# Allegro board ex2_rlc.brd
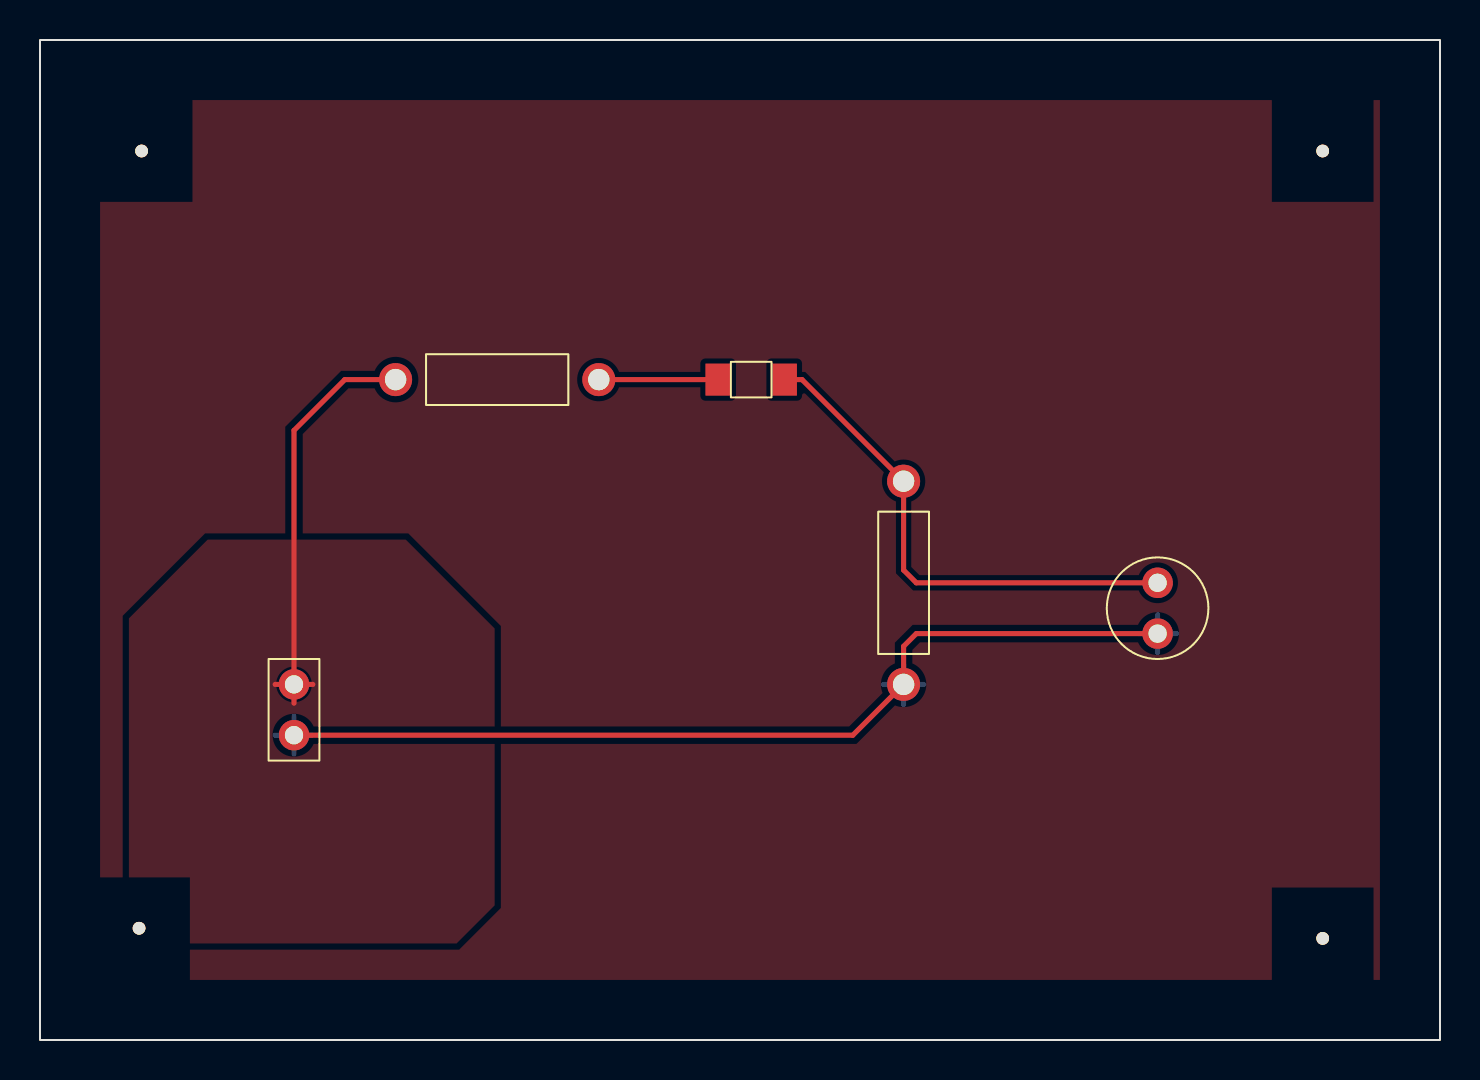
[diagram p0: board, top side]
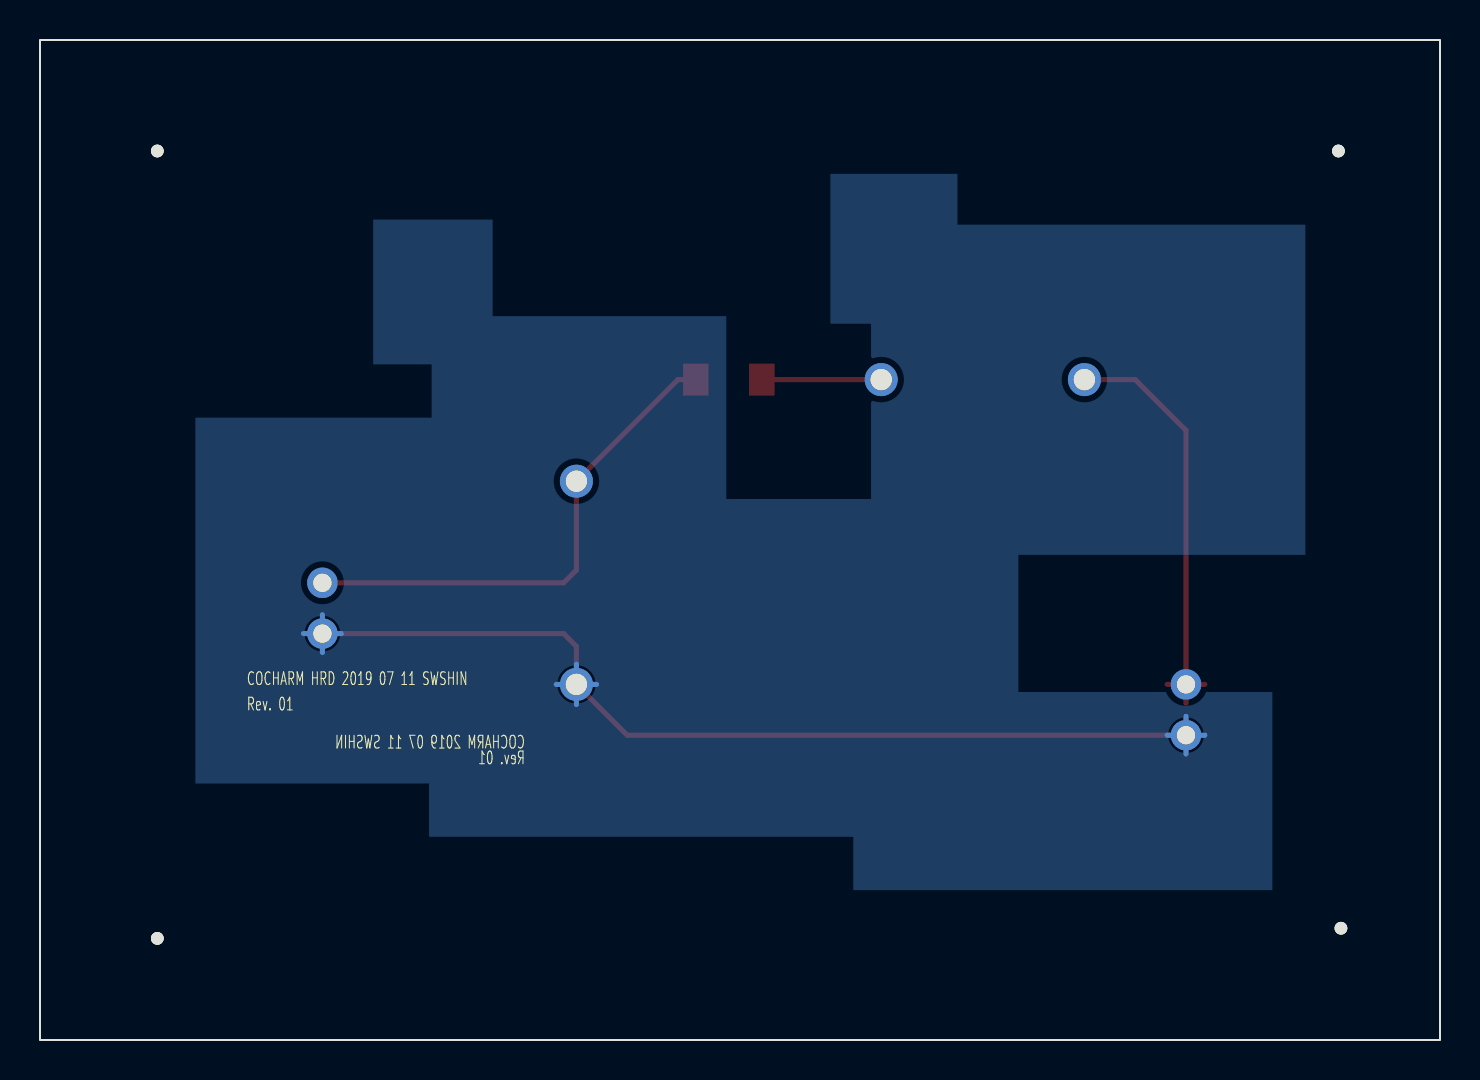
[diagram p1: board, bottom side, seen from below]

Outline 70 x 50 mm; copper layers: TOP, BOTTOM. Coordinates in mm from the lower left corner of the outline.
Outline path: rectangle 0,0 70,50

## Design rules (mm)
constraint set DEFAULT: min track width 0.254
net group BASENETS: nets KKK N00107

## Placement (name value [footprint] x y rotation side)
C1  1u  [CAP196]  55.88 22.86 180 top
J1  CON2  [JUMPER2]  12.7 17.78 270 top
L1  100n  [SMDRES]  35.56 33.02 0 top
NOREF  -  [unnamed]  4.95 5.59 0 top
NOREF#2  -  [unnamed]  5.08 44.45 0 top
NOREF#3  -  [unnamed]  64.14 44.45 0 top
NOREF#4  -  [unnamed]  64.14 5.08 0 top
R1  330  [RES400]  17.78 33.02 270 top
R2  330  [RES400]  43.18 27.94 180 top

## Library data of the parts
C1 = CAP NP: Tolerance: ***; User Part Number: ***
J1 = CON2: User Part Number: ***
L1 = INDUCTOR: Tolerance: ***; User Part Number: ***
R1 R2 = R: Tolerance: ***; User Part Number: ***

## Footprints (pads in the part's own frame, mm; a bottom-side part is the same pattern mirrored in y, then rotated)
CAP196
  round 1.524 hole 0.914: 1(0,0) 2(0,2.54)
JUMPER2
  round 1.524 hole 0.914: 1(0,0) 2(2.54,0)
RES400
  round 1.651 hole 1.067: 1(0,0) 2(0,10.16)
SMDRES
  rect 1.27x1.6 smd: 1(-1.651,0) 2(1.651,0)
unnamed
  round 0.635 hole 3.175 unplated: (0,0)

## Nets
GND: C1.2 J1.2 R2.2
VCC: J1.1 R1.1
KKK: L1.1 R1.2
N00107: C1.1 L1.2 R2.1

## Routing (per net, layer and track width the routed paths; a pad name or vN(x,y) marks a point on that pad's centre or on a via; arc(x,y) is an arc through that point)
GND: length 58
  TOP w0.254: J1.2 40.64,15.24 R2.2 43.18,19.68 43.81,20.32 C1.2
  BOTTOM w0.254: C1.2 55.88,21.26 ; C1.2 55.88,19.38 ; C1.2 54.94,20.32 ; C1.2 56.82,20.32 ; 12.7,14.3 J1.2 ; J1.2 12.7,16.18 ; J1.2 13.64,15.24 ; J1.2 11.76,15.24 ; R2.2 44.19,17.78 ; R2.2 43.18,18.79 ; R2.2 43.18,16.77 ; R2.2 42.17,17.78
VCC: length 21.7
  TOP w0.254: 11.76,17.78 J1.1 ; J1.1 13.64,17.78 ; J1.1 12.7,16.84 ; J1.1 12.7,30.48 15.24,33.02 R1.1
KKK: length 6
  TOP w0.254: R1.2 L1.1
N00107: length 25.5
  TOP w0.254: L1.2 38.1,33.02 R2.1 43.18,23.49 43.81,22.86 C1.1

## Copper pours and planes (outline as drawn; the poured copper is in the pictures)
GND on BOTTOM: 24.13,43.31 30.48,43.31 30.48,35.81 28.45,35.81 28.45,27.05 35.69,27.05 35.69,36.2 47.37,36.2 47.37,41.02 53.34,41.02 53.34,33.78 50.42,33.78 50.42,31.11 62.23,31.11 62.23,12.83 50.55,12.83 50.55,10.16 29.34,10.16 29.34,7.49 8.38,7.49 8.38,17.4 21.08,17.4 21.08,24.26 6.73,24.26 6.73,40.77 24.13,40.77
VCC on TOP: 8.38,25.02 18.29,25.02 22.73,20.57 22.73,6.73 20.83,4.83 5.08,4.83 4.45,5.46 4.45,21.08
Net_1 on TOP: 3,47 67,47 67,3 3,3

## Text on the board
Ref Des/Silkscreen Bottom: COCHARM 2019 07 11 SWSHIN | Rev. 01 | COCHARM HRD 2019 07 11 SWSHIN
USER_PART_NUM_TOP: V-CUT | FIGURE | FINISHED_SIZE | 0.914 | 1.067 | 3.175 | DRILL CHART: TOP to BOTTOM | ALL UNITS ARE IN MILLIMETERS | PLATED | NON-PLATED | QTY | 4
